# Altium PCB Mega2560PCB.PcbDoc
Units mil, origin at the board's own origin, x right, y up, seen from the top; angles counter-clockwise.
Board outline 3543.31 x 2165.35 mil, 4 copper layers (Top Layer, GND02, PWR03, Bottom Layer), stack 23.756 mil thick; 55 components, 99 nets, 321 pads, 36 vias.
Unrouted connection lines stored in the file: 103.
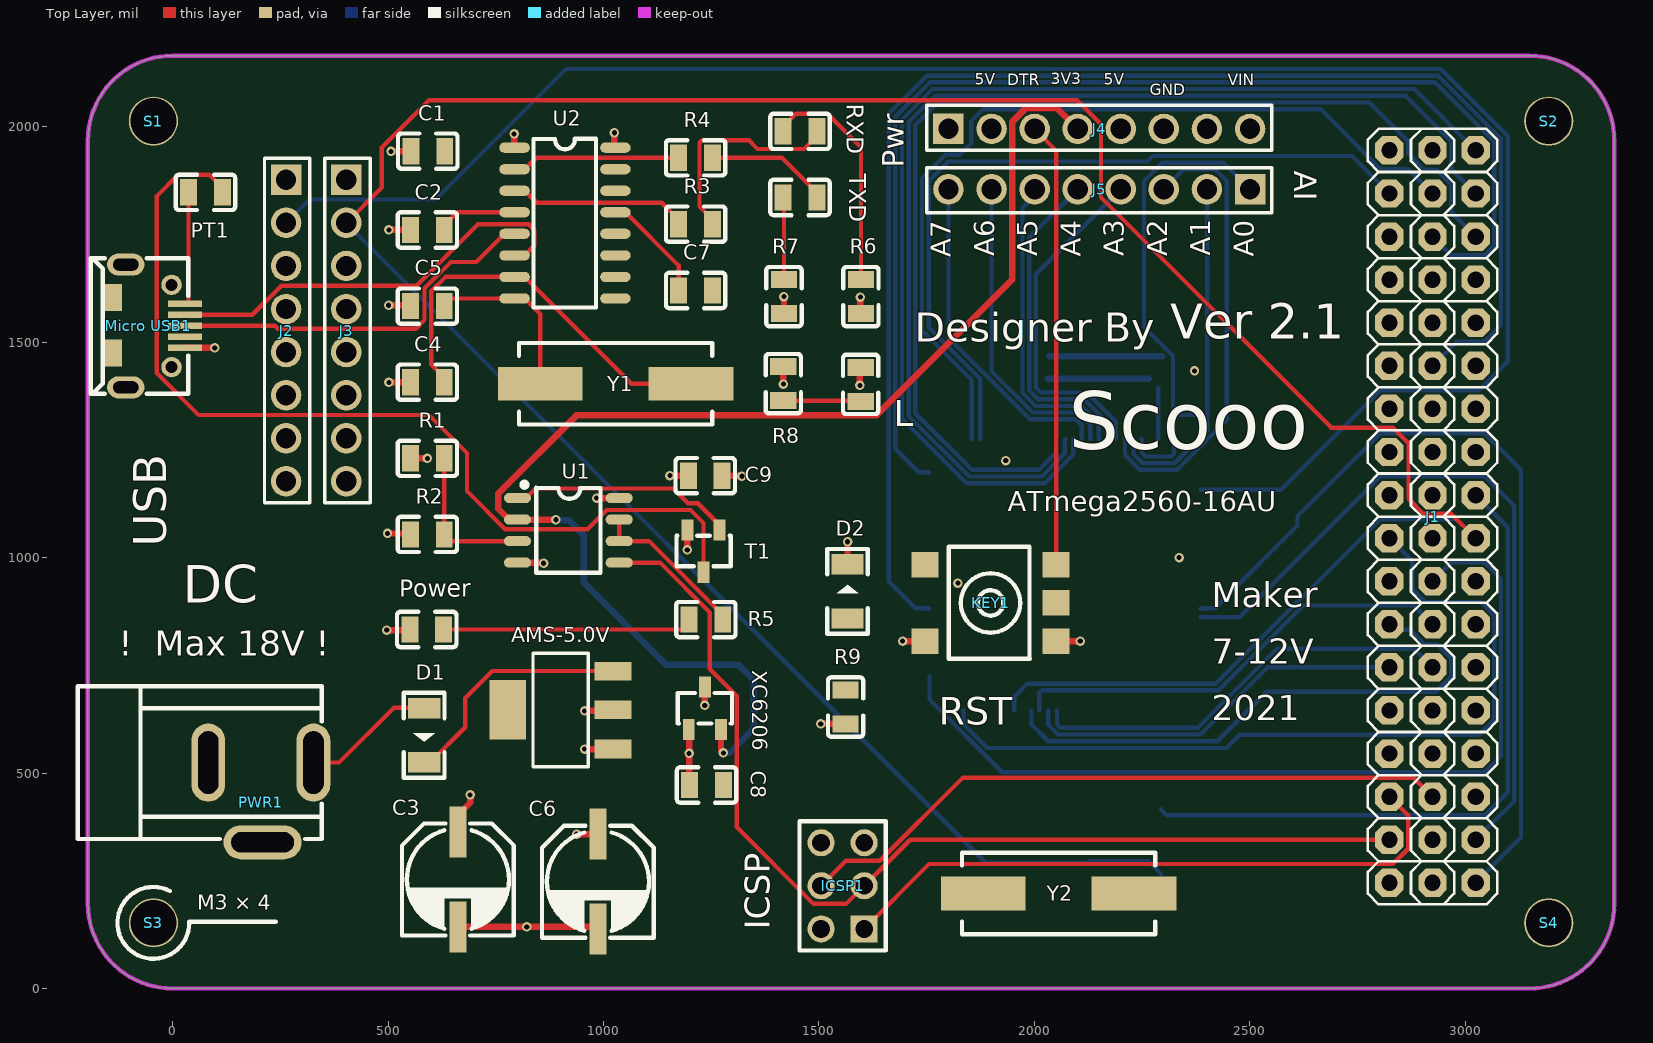
[diagram p0: Top Layer view]
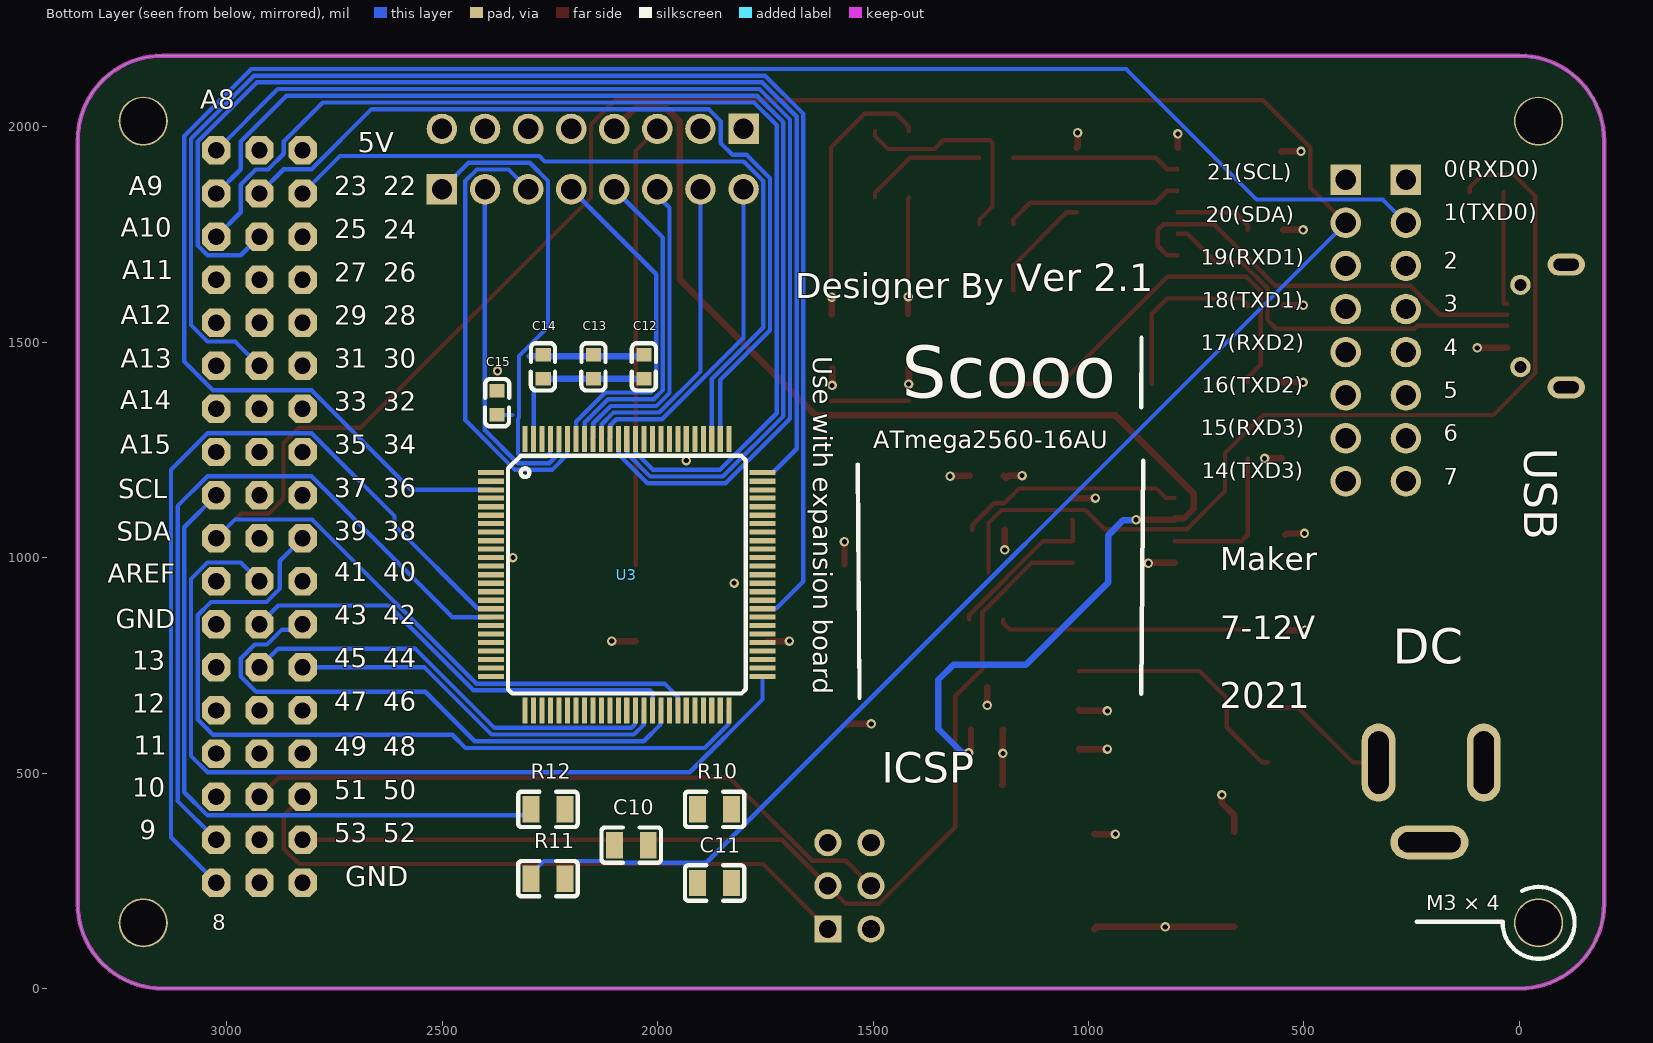
[diagram p1: Bottom Layer view, seen from below]
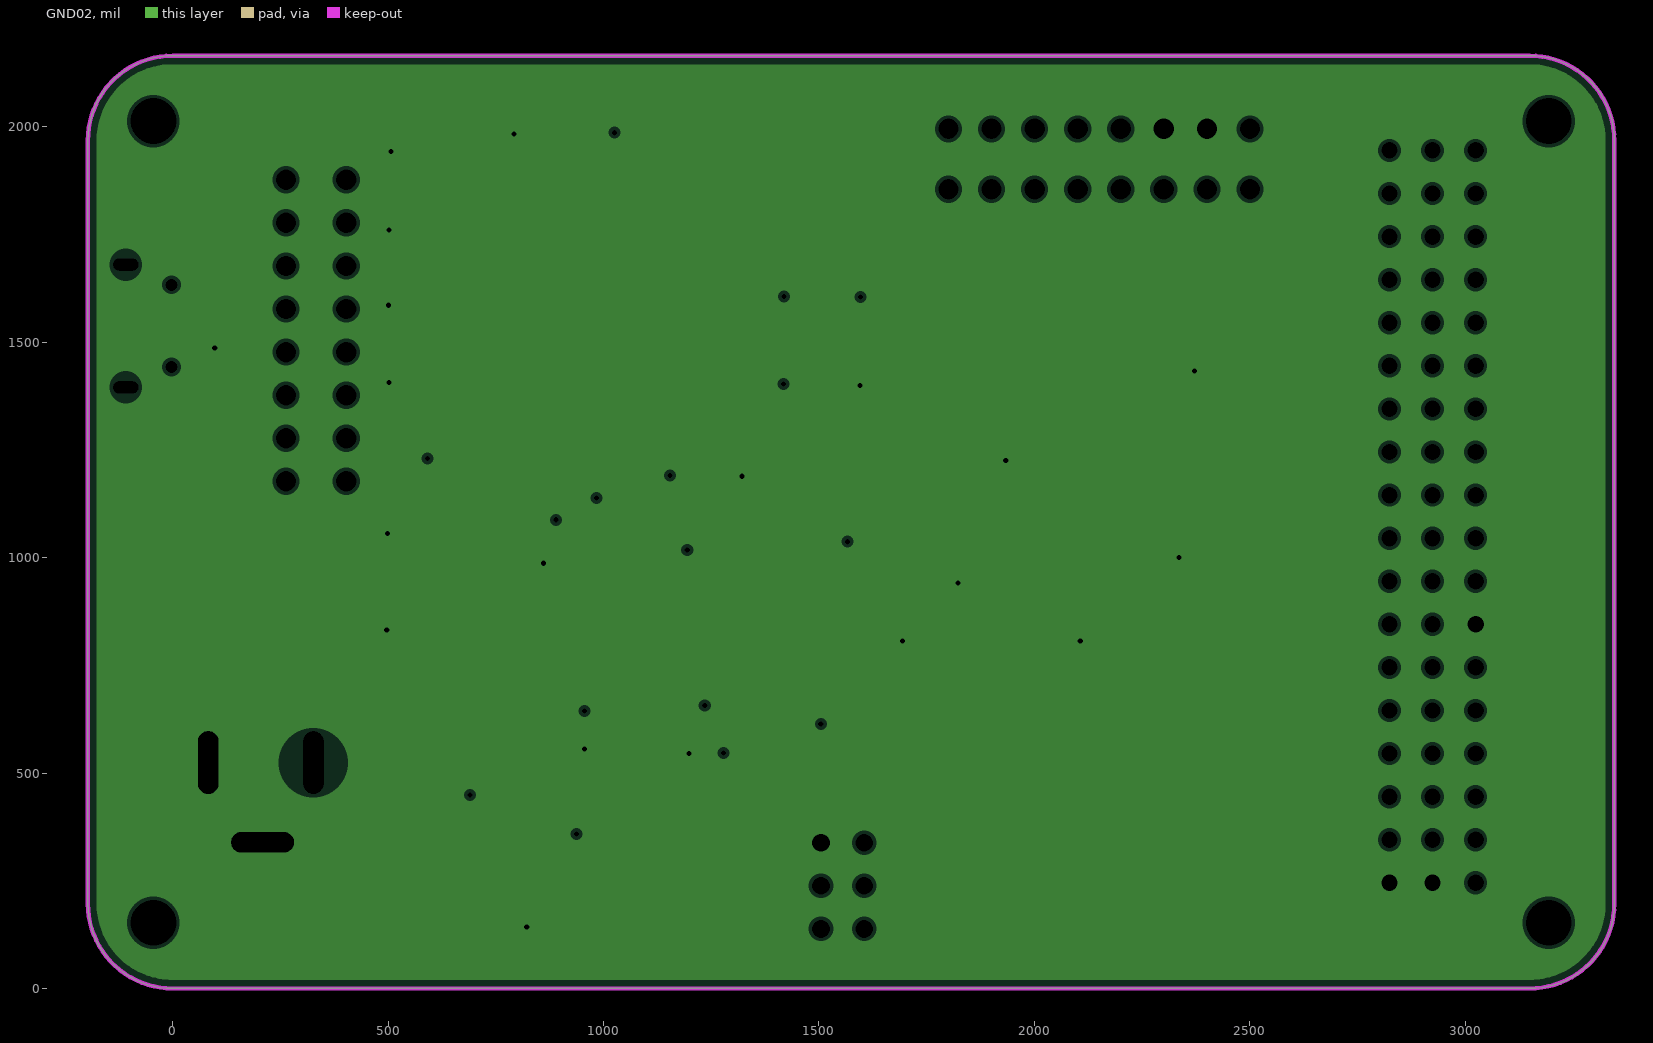
[diagram p2: GND02, clearances drawn from the general rule]
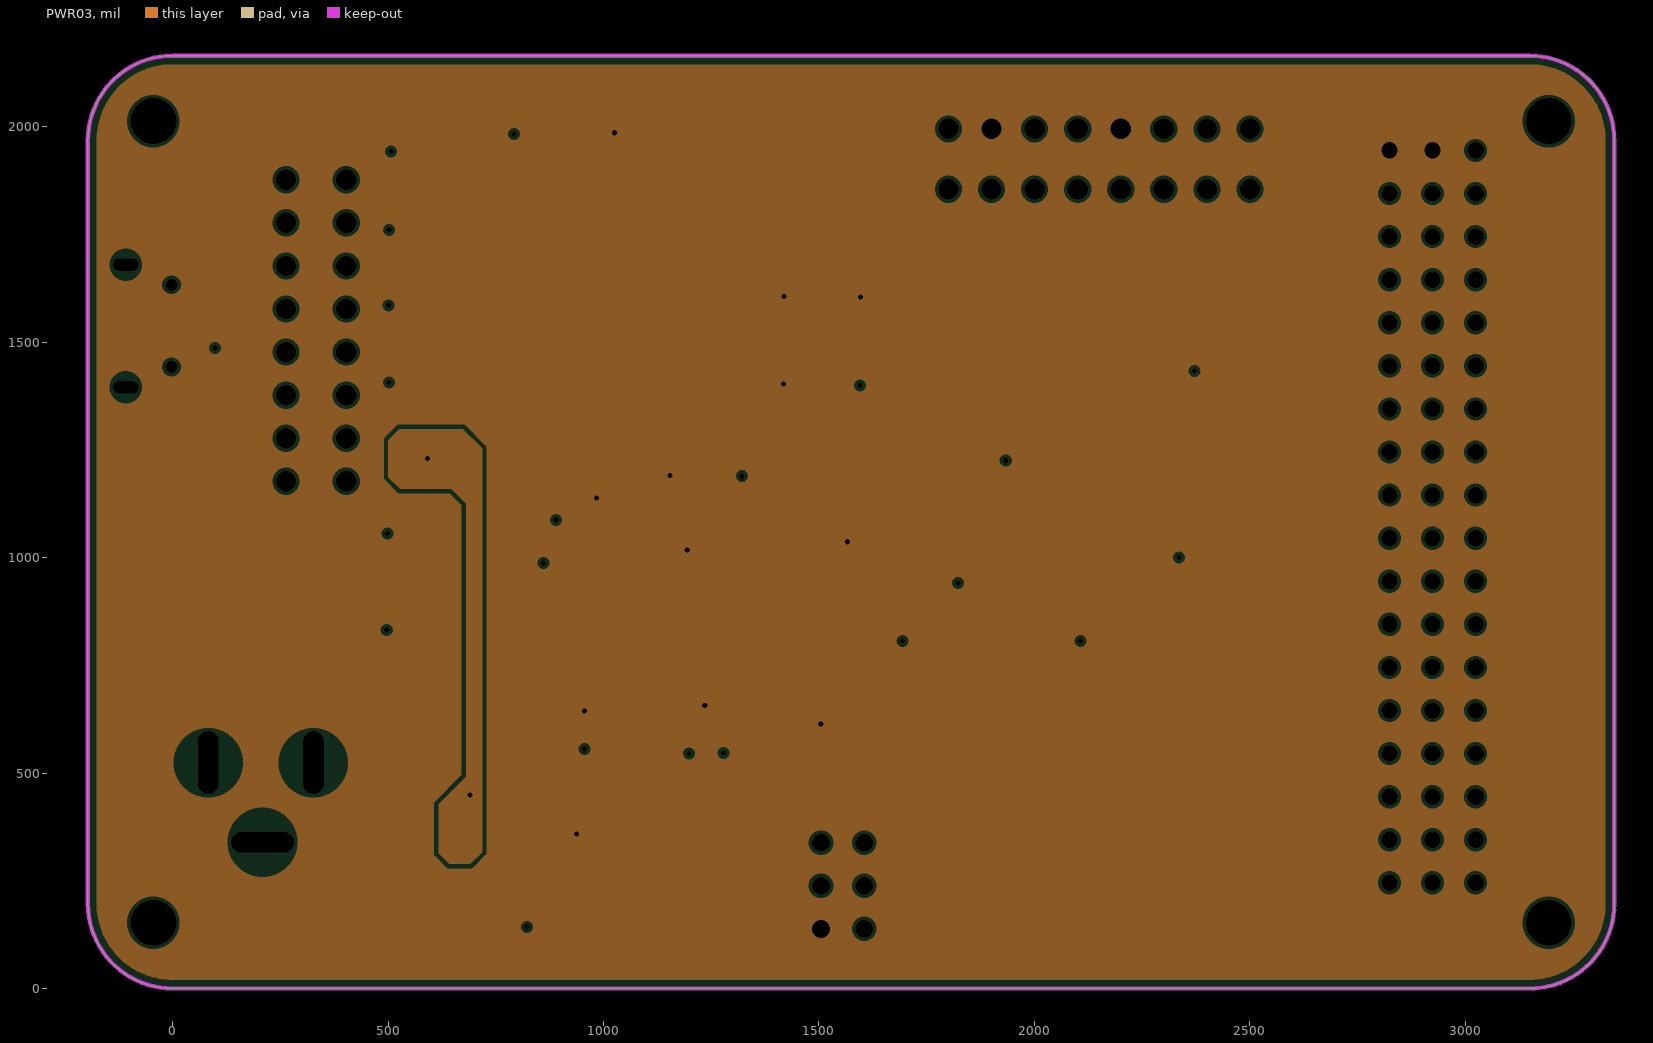
[diagram p3: PWR03, clearances drawn from the general rule]

## Layer stack, top to bottom
Top Solder: solder mask 0.4, Solder Resist, Dk 3.5
Top Layer: signal copper 1.4
Dielectric 2: prepreg 2.8, PP-006, Dk 4.1
GND02: plane copper 1.378, net GND
Dielectric 1: dielectric 12.6, FR-4, Dk 4.8
PWR03: plane copper 1.378, net +5V
Dielectric 3: prepreg 2.8, PP-006, Dk 4.1
Bottom Layer: signal copper 1.4
Bottom Solder: solder mask 0.4, Solder Resist, Dk 3.5

## Board outline
0,0 cw(c0,196.85) -196.85,196.85 -196.85,1968.5 cw(c0,1968.5) 0,2165.35 3149.61,2165.35 cw(c3149.61,1968.5) 3346.46,1968.5 3346.46,196.85 cw(c3149.61,196.85) 3149.61,0

## Design rules (kind name [scope] priority, off if disabled: settings)
Clearance [All] p1: gap=5.5 ignorepadtopadclearanceinfootprint=FALSE
HoleSize [All] p1: absolutevalues=TRUE maxlimit=248.03 minlimit=7.87 maxpercent=80.000 minpercent=20.000
PlaneClearance [All] p1: clearance=8
PlaneConnect [All] p1: planeconnectstyle=Relief reliefexpansion=20 reliefentries=4 reliefconductorwidth=10 reliefairgap=10
PolygonConnect [All] p1: thpad.connectstyle=Relief thpad.reliefconductorwidth=10 thpad.reliefentries=4 thpad.polygonreliefangle="90 Angle" thpad.airgapwidth=10 smdpad.connectstyle=Relief smdpad.reliefconductorwidth=10 smdpad.reliefentries=4 smdpad.polygonreliefangle="90 Angle" smdpad.airgapwidth=10 via.connectstyle=Direct via.reliefconductorwidth=10 via.reliefentries=4 via.polygonreliefangle="90 Angle" via.airgapwidth=10
RoutingVias [All] p1: holewidth=12 width=22 viastyle="Through Hole" minholewidth=12 minwidth=22 maxholewidth=12 maxwidth=22
SilkToSilkClearance [All] p1: silktosilkclearance=2
SilkToSolderMaskClearance [IsPad] p1: minsilkscreentomaskgap=2 clearancetoexposedcopper=TRUE
SolderMaskExpansion [All] p1: expansion=4 istentingtop=FALSE
Width PWR [InNetClass('PWR')] p1: maxlimit=60 minlimit=15 preferedwidth=15
Width [All] p2: maxlimit=15 minlimit=6 preferedwidth=10
25 further rules are at their usual default settings.

## Classes and differential pairs
net class PWR: +3V3 +5V GND VIN

## Components (designator, comment, footprint, x,y, rotation, side; value= is the part's Value field where it differs from the comment)
AMS-5.0V "AMS1117-5.0" AMS1117-5.0V 900.1,646.4 r0 top locked (schematic designator AMS1)
C1 "0.1uF" 0805 592.1,1943.8 r0 top locked
C2 "0.1uF" 0805 591,1760.7 r0 top locked
C3 "100uF 35V" 极性电容 657.15,257.37 r270 top locked
C4 "22pF" 0805 591,1407.33 r0 top locked
C5 "22pF" 0805 591,1584.02 r0 top locked
C6 "100uF 35V" 极性电容 982.15,252.37 r270 top locked
C7 "0.1uF" 0805 1213.8,1620.3 r180 top locked
C8 "0.1pF" 0805 1239.31,472.4 r0 top locked
C9 "0.1uF" 0805 1236.21,1190.4 r0 top locked
C10 "22pF" 0805 2061.37,332.8 r180 bottom locked
C11 "22pF" 0805 1867.87,244.8 r180 bottom locked
C12 "100nF-0603" 0603_CAP 2031.73,1443.06 r90 bottom locked
C13 "100nF-0603" 0603_CAP 2148.86,1443.06 r90 bottom locked
C14 "100nF-0603" 0603_CAP 2265.98,1443.06 r90 bottom locked
C15 "100nF-0603" 0603_CAP 2373.2,1359.8 r270 bottom locked
D1 "二极管" "1206 正负" 583.8,587.9 r90 top locked
D2 "二极管" "1206 正负" 1566.42,921.95 r270 top locked
ICSP1 "ICSP" "排针 2*3 PIN" 1555.1,238.4 r90 top locked
J1 "Header 3*18" "排针 3*18 PIN" 2874.41,1095.38 r0 top locked
J2 "Header 8" "排针 8 PIN" 263.15,1527.27 r270 top locked
J3 "Header 8" "排针 8 PIN" 403.15,1527.27 r270 top locked
J4 "Header 8" "排针 8 PIN" 2150.79,1995.38 r0 top locked
J5 "Header 8" "排针 8 PIN" 2150.79,1855.38 r180 top locked
KEY1 "按键" 按键 1898.5,895.1 r0 top locked
L "LED" "0805 - LED" 1597,1402.3 r90 top locked
"Micro USB1" "Micro USB" MICRO-USB -56.59,1537.88 r270 top locked
Power "LED" "0805 - LED" 589.7,833.4 r180 top locked
PT1 "500MA" 0805 76,1848 r0 top locked
PWR1 "PWR" DC电源 204.6,431.84 r0 top locked
R1 "10K" 0805 591,1230.67 r180 top locked
R2 "10K" 0805 591,1054 r0 top locked
R3 "1K" 0805 1213.8,1774.3 r0 top locked
R4 "1K" 0805 1213.8,1928.32 r0 top locked
R5 "10K" 0805 1237.5,856.4 r180 top locked
R6 "1K" 0805 1597.61,1606.02 r270 top locked
R7 "1K" 0805 1418.98,1606.02 r270 top locked
R8 "1K" 0805 1417.38,1404 r90 top locked
R9 "10K" 0805 1562,653.3 r270 top locked
R10 "1M" 0805 1867.87,415.8 r0 bottom locked
R11 "10K" 0805 2254.87,254.8 r180 bottom locked
R12 "10K" 0805 2254.87,415.8 r180 bottom locked
RXD "LED" "0805 - LED" 1456.3,1989.7 r0 top locked
S1 "散热孔" 散热孔 -44.85,2013.37 r0 top locked
S2 "散热孔" 散热孔 3194.15,2013.37 r0 top locked
S3 "散热孔" 散热孔 -44.85,152.37 r0 top locked
S4 "散热孔" 散热孔 3194.15,152.37 r0 top locked
T1 "MOSFET-P" SI2301 1232.3,1015.4 r90 top locked
TXD "LED" "0805 - LED" 1456.1,1836.2 r0 top locked
U1 "LM358" LM358 918.4,1063.5 r270 top locked
U2 "CH340G" CH340G 910.6,1776.8 r180 top locked
U3 "ATmega2560-16AU" ATMEGA2560-AU 2071.7,960.4 r180 bottom locked
XC6206 "XC6206P332" XC6206P332-3.3V 1235.4,650.4 r270 top locked (schematic designator XC1)
Y1 "12M" 贴片晶振 1028.2,1403.8 r180 top locked
Y2 "16M" 贴片晶振 2056.7,220.5 r0 top locked

## Footprints (in the part's own frame and the unit in brackets; to place one, negate y for a bottom-side part, rotate by r counter-clockwise, add the part's x,y. Pads: shape width x height; smd on the part's side, far side on the other; paste and mask are expansions set on the pad)
0603_CAP [mm]
  rect 0.8x0.9 smd: 1(-0.7,0) 2(0.7,0)
  silkscreen extent -1.4,-0.7 1.4,0.72, body extent -0.8,-0.41 0.8,0.41, height 0.45
0805 [mm]
  rect 1x1.55 smd: 1(-1,0) 2(1,0)
  silkscreen extent -1.75,-1.04 1.75,1.04, body extent -1,-0.62 1,0.62, height 0.5
"0805 - LED" [mm]
  rect 1x1.55 smd: 1(-1,0) 2(1,0)
  silkscreen extent -1.75,-1.04 1.75,1.04, body extent -1,-0.62 1,0.62, height 0.5
"1206 正负" [mm] "开关二极管"
  rect 1.2x1.9 smd: 1(1.6,0) 2(-1.6,0)
  silkscreen extent -2.5,-1.2 2.5,1.2, body extent -1.6,-0.8 1.6,0.8, height 0.55
AMS1117-5.0V [mil]
  rect 85x43 smd: 1(122,-90.5) 2(122,0.5) 3(122,90.5)
  rect 85x138 smd: 4(-122,0.5)
  silkscreen extent -64,-132 64,132, body extent -138,-132 138,132, height 71
ATMEGA2560-AU [mil] "主控芯片"
  rect 60x12 smd: 1(-314.98,236.98) 2(-314.98,216.98) 3(-314.98,196.98) 4(-314.98,177.98) 5(-314.98,157.98) 6(-314.98,137.98) 7(-314.98,118.98) 8(-314.98,98.98) 9(-314.98,78.98) 10(-314.98,59.98) 11(-314.98,39.98) 12(-314.98,19.98) 13(-314.98,-0.02) 14(-314.98,-19.7) 15(-314.98,-39.39) 16(-314.98,-59.07) 17(-314.98,-78.76) 18(-314.98,-98.44) 19(-314.98,-118.13) 20(-314.98,-137.81) 21(-314.98,-157.5) 22(-314.98,-177.18) 23(-314.98,-196.87) 24(-314.98,-216.55) 25(-314.98,-236.24) 51(314.98,-236.24) 52(314.98,-216.55) 53(314.98,-196.87) 54(314.98,-177.18) 55(314.98,-157.5) 56(314.98,-137.81) 57(314.98,-118.13) 58(314.98,-98.44) 59(314.98,-78.76) 60(314.98,-59.07) 61(314.98,-39.39) 62(314.98,-19.7) 63(314.98,-0.02) 64(314.98,19.98) 65(314.98,39.98) 66(314.98,59.98) 67(314.98,78.98) 68(314.98,98.98) 69(314.98,118.98) 70(314.98,137.98) 71(314.98,157.98) 72(314.98,177.98) 73(314.98,196.98) 74(314.98,216.98) 75(314.98,236.98)
  rect 12x60 smd: 26(-236.24,-314.98) 27(-216.56,-314.98) 28(-196.87,-314.98) 29(-177.19,-314.98) 30(-157.5,-314.98) 31(-137.82,-314.98) 32(-118.13,-314.98) 33(-98.45,-314.98) 34(-78.76,-314.98) 35(-59.08,-314.98) 36(-39.39,-314.98) 37(-19.71,-314.98) 38(-0.02,-314.98) 39(19.98,-314.98) 40(39.98,-314.98) 41(59.98,-314.98) 42(78.98,-314.98) 43(98.98,-314.98) 44(118.98,-314.98) 45(137.98,-314.98) 46(157.98,-314.98) 47(177.98,-314.98) 48(196.98,-314.98) 49(216.98,-314.98) 50(236.98,-314.98) 76(236.98,314.98) 77(216.98,314.98) 78(196.98,314.98) 79(177.98,314.98) 80(157.98,314.98) 81(137.98,314.98) 82(118.98,314.98) 83(98.98,314.98) 84(78.98,314.98) 85(59.98,314.98) 86(39.98,314.98) 87(19.98,314.98) 88(-0.02,314.98) 89(-19.71,314.98) 90(-39.39,314.98) 91(-59.08,314.98) 92(-78.76,314.98) 93(-98.45,314.98) 94(-118.13,314.98) 95(-137.82,314.98) 96(-157.5,314.98) 97(-177.19,314.98) 98(-196.87,314.98) 99(-216.56,314.98) 100(-236.24,314.98)
  silkscreen extent -276,-276 276,276, body extent -315,-315 315,315, height 47
CH340G [mil]
  oval 70.79x23.62 smd: 1(117,-175) 2(117,-125) 3(117,-75) 4(117,-25) 5(117,25) 6(117,75) 7(117,125) 8(117,175) 9(-117,175) 10(-117,125) 11(-117,75) 12(-117,25) 13(-117,-25) 14(-117,-75) 15(-117,-125) 16(-117,-175)
  silkscreen extent -72,-196 73,196, body extent -123,-197 123,197, height 59
DC电源 [mm]
  oval 2x4.6 hole 1.2 slot 3.7 at 90 deg: 1(3.1,2.35) 2(-3.1,2.35)
  oval 4.6x2 hole 1.2 slot 3.7 at 0 deg: 3(0.1,-2.35)
  silkscreen extent -10.8,-2.15 3.6,6.85, body extent -10.72,-2.65 3.1,6.85, height 11.2
LM358 [mm]
  oval 0.6x1.598 smd: 1(-1.905,-3) 2(-0.635,-3) 3(0.635,-3) 4(1.905,-3) 5(1.905,3) 6(0.635,3) 7(-0.635,3) 8(-1.905,3)
  silkscreen extent -2.84,-2.74 2.5,1.9, body extent -2.5,-3 2.5,3, height 1.8
MICRO-USB [mm]
  oval 1.3x2.199 hole 0.7 slot 1.5 at 90 deg: 0(-3.619,-1.329) 0(3.619,-1.329)
  round 1.2 hole 0.7: 0(-2.425,1.371) 0(2.425,1.371)
  rect 1.6x1.2 smd: 0(-1.683,-2.14) 0(1.596,-2.156)
  rect 0.4x2 smd: 1(-1.31,2.156) 2(-0.66,2.156) 3(-0.01,2.156) 4(0.64,2.156) 5(1.29,2.156)
  silkscreen extent -4,-3.4 4,2.36, body extent -3.98,-4.32 3.98,1.46, height 2.37
SI2301 [mm]
  rect 1.25x0.7 smd: 1(1.25,-0.95) 2(1.25,0.95) 3(-1.25,0)
  silkscreen extent -0.9,-1.6 0.9,1.6
XC6206P332-3.3V [mm]
  rect 1.25x0.7 smd: 1(1.25,-0.95) 2(1.25,0.95) 3(-1.25,0)
  silkscreen extent -0.9,-1.6 0.9,1.6
按键 [mm] "6*6"
  rect 1.6x1.5 smd: 1(-3.867,2.25) 2(3.867,2.25) 3(-3.867,-2.25) 4(3.867,-2.25) 5(3.867,0)
  silkscreen extent -2.46,-3.3 2.32,3.3
"排针 2*3 PIN" [mm]
  rect 1.6x1.6 hole 1.05: 1(-2.54,-1.27)
  round 1.6 hole 1.05: 2(-2.54,1.27) 3(0,-1.27) 4(0,1.27) 5(2.54,-1.27) 6(2.54,1.27)
  silkscreen extent -3.81,-2.54 3.81,2.54, body extent -3.81,-2.54 3.81,2.54, height 8.54
"排针 3*18 PIN" [mil]
  oct 66x66 hole 38: 1(-50,850) 2(50,850) 3(-50,750) 4(50,750) 5(-50,650) 6(50,650) 7(-50,550) 8(50,550) 9(-50,450) 10(50,450) 11(-50,350) 12(50,350) 13(-50,250) 14(50,250) 15(-50,150) 16(50,150) 17(-50,50) 18(50,50) 19(-50,-50) 20(50,-50) 21(-50,-150) 22(50,-150) 23(-50,-250) 24(50,-250) 25(-50,-350) 26(50,-350) 27(-50,-450) 28(50,-450) 29(-50,-550) 30(50,-550) 31(-50,-650) 32(50,-650) 33(-50,-750) 34(50,-750) 35(-50,-850) 36(50,-850) 37(150,850) 38(150,750) 39(150,650) 40(150,550) 41(150,450) 42(150,350) 43(150,250) 44(150,150) 45(150,50) 46(150,-50) 47(150,-150) 48(150,-250) 49(150,-350) 50(150,-450) 51(150,-550) 52(150,-650) 53(150,-750) 54(150,-850)
  silkscreen extent -100,-900 200,900, body extent -100,-900 200,900, height 336
"排针 8 PIN" [mm]
  rect 1.8x1.8 hole 1.2: 1(-8.89,0)
  round 1.8 hole 1.2: 2(-6.35,0) 3(-3.81,0) 4(-1.27,0) 5(1.27,0) 6(3.81,0) 7(6.35,0) 8(8.89,0)
  silkscreen extent -10.16,-1.27 10.16,1.4, body extent -10.16,-1.27 10.16,1.27, height 8.54
散热孔 [mm]
  round 2.9 hole 2.7: 1(0,0)
极性电容 [mm]
  rect 3x1 smd: 1(-2.691,0.124) 2(2.909,0.124)
  silkscreen extent -3.19,-3.18 3.41,3.42
贴片晶振 [mm] "OSC-SMD_L11.5-W4.8-P9.50"
  rect 5x2 smd: 1(-4.445,0) 2(4.445,0)
  silkscreen extent -5.7,-2.4 5.7,2.4

## Part data
C1 C2 C4 C5 C7 C9 C10 C11: library part CAP
C3 C6: library part "Cap Pol极性电容", "极性电容器", LatestRevisionDate=17-Jul-2002, LatestRevisionNote="Re-released for DXP Platform.", PackageDescription="Polarized Capacitor (Radial); 2 Leads", PackageReference=RB7.6-15, Published=8-Jun-2000, Publisher="Altium Limited"
C8: library part CAP电容
C12 C13 C14 C15: library part CAP-0603, "0603 50V"
ICSP1: library part "Header 2*3", "排针"
J2 J3 J4 J5: "排针"
KEY1: "Switch", LatestRevisionDate=17-Jul-2002, LatestRevisionNote="Re-released for DXP Platform.", PackageDescription="Switch; 2 Leads", PackageReference=SPST-2, Published=24-Mar-1999, Publisher="Altium Limited"
PT1: library part PT, "磁珠"
R1 R2 R3 R4 R5 R6 R7 R8 R9 R10: library part RES
R11 R12: library part 电阻
T1: library part MOSFET-P(MOS), "摩斯管", LatestRevisionDate=17-Jul-2002, LatestRevisionNote="Re-released for DXP Platform.", PackageDescription="TO, Flat Index; 3 In-Line, Axial Leads; Body Dia. 4.6mm; Lead Dia. 0.5 mm (max)", PackageReference=E3, PackageVersion=1995/1996, Published=8-Jun-2000, Publisher="Altium Limited"
U1: "电源控制"
U3: "8-bit AVR Microcontroller, 4.5-5.5V, 16MHz, 256KB Flash, 4KB EEPROM, 8KB SRAM, 86 GPIO pins, 100-pin TQFP, Industrial Grade (-40°C to 85°C), Pb-Free", Code_JEDEC=MS-026-AED, ComponentLink1Description="Manufacturer URL", ComponentLink1URL=http://www.atmel.com/, ComponentLink2Description="ATmega640/1280/1281/2560/2561 Datasheet", ComponentLink2URL=http://www.atmel.com/dyn/resources/prod_documents/doc2549.pdf, ComponentLink3Description="ATmega640/1280/1281/2560/2561 Summary", ComponentLink3URL=http://www.atmel.com/dyn/resources/prod_documents/2549S.pdf, DatasheetVersion="revN, May-2011", PackageDescription="100-Pin Thin Profile Plastic Quad Flat Pack (TQFP), 14 x 14 x 1.0 mm Body, 0.5 mm Pitch", PackageReference=100A, PackageVersion="revD, Oct-2010"
Y1 Y2: library part CRYSTAL

## Via types
v1: diameter 22, hole 12, Top Layer to Bottom Layer, tented both sides, 36 vias

## Nets (pads, with @x,y where several pads share a name; then routed paths per layer and width w, separated by ;. In a path a pad name is that pad's centre, name@x,y a point inside that pad or via, vN(x,y) a via of type N, cw(c..) or ccw(c..) an arc to the next point about the centre after c; other vN are vias at no path point)
+3V3: C8.2 J4.4 U1.2 XC6206.2 | length 3070.6
  Top Layer w15: v1(889.7,1088) 889.45,1088.25 800.54,1088.25 U1.2 797.47,1091.32 777.83,1091.32 755.83,1113.31 755.83,1148.78 937.3,1330.24 1632.9,1330.24 1949.22,1646.57 1949.22,2012.31 1980.73,2043.82 2052.35,2043.82 J4.4 ; XC6206.2 1272.8,554.39 1278.4,548.79 v1(1278.4,546.9)
  Bottom Layer w15: v1(889.7,1088) 891.04,1086.66 919.74,1086.66 953.8,1052.6 953.8,943.2 1145.2,751.8 1313.4,751.8 1348.8,716.4 1348.8,602.9 1292.8,546.9 v1(1278.4,546.9)
+5V: AMS-5.0V.2 C1.2 C6.1 C9.1 C12.2 C13.2 C14.2 D2.2 ICSP1.2 J1.1 J1.2 J4.2 J4.5 R6.2 R7.2 R8.2 R9.2 R11.2 R12.2 T1.2 U1.8 U2.16 U3.100 XC6206.3 | length 835.4
  Top Layer w15: v1(937.4,358.5) 937.58,358.32 C6.1 ; v1(956.3,644.2) 1019.4,644.2 AMS-5.0V.2 ; v1@983.5,1138 v1(984,1138.5) U1.8 ; v1(1025.3,1986.5) 1025.3,1954.1 U2.16 ; v1(1154.2,1190.5) 1184.54,1190.5 1190.74,1184.3 C9.1 ; v1(1194.4,1017.9) 1194.9,1018.4 T1.2 ; v1(1235.1,657.2) 1235.4,657.5 XC6206.3 ; v1@1417.7,1403.1 R8.2@1417.7,1442.63 ; R7.2 v1(1418.98,1606.18) ; v1(1504.4,614.1) 1557.77,614.1 1559.97,611.9 R9.2 ; D2.2 1566.42,1036.92 v1(1566.7,1037.2) ; R6.2@1596.3,1565.37 v1@1596.3,1604.9
  Bottom Layer w15: C12.2@2034.25,1468.1 2296.7,1468.1
  other v1: 1417.48,1402.88 1596.52,1605.12
AREF: C15.2 J1.47 U3.98 | length 35.7
  Bottom Layer w10: 2337.46,1331.04 C15.2@2373.2,1331.04
DTR: C7.1 D2.1 ICSP1.5 J4.3 KEY1.1 KEY1.2 R9.1 U3.30 | length 1032.4
  Top Layer w10: J4.3 2050.74,1945.43 KEY1.2
GND: "Micro USB1.5" AMS-5.0V.1 C1.1 C2.1 C3.2 C4.1 C5.1 C6.2 C8.1 C9.2 C10.2 C11.2 C12.1 C13.1 C14.1 C15.1 ICSP1.6 J1.35 J1.36 J1.48 J4.6 J4.7 KEY1.3 KEY1.4 L.2 Power.2 PWR1.2 PWR1.3 R2.1 U1.4 U2.1 U3.11 U3.32 U3.62 U3.81 U3.99 XC6206.1 | length 1512.2
  Top Layer w15: 28.29,1487.11 v1@97.69,1487.11 ; v1(496.9,832.1) 541.53,832.1 Power.2@542.13,832.7 ; v1(498.6,1056.2) 539.93,1056.2 R2.1@543.13,1053 ; v1(501.3,1585.9) 546.73,1585.9 C5.1@546.83,1586 ; v1(501.9,1406.9) 546.53,1406.9 C4.1@547.23,1406.2 ; v1(501.9,1761) 547.53,1761 C2.1@548.03,1760.5 ; v1(506.75,1943.1) v1@515,1943.1 ; v1@515.7,1943.8 v1@515,1943.1 ; C4.1 C4.1@552.18,1407.88 ; C1.1 551.63,1942.7 551.23,1943.1 v1@515,1943.1 ; C3.2 v1(822.05,142.84) 982.05,142.84 C6.2 ; U2.1@792.4,1951.8 v1(792.4,1983.6) ; U1.4 859.7,988.5 v1(861,987.2) ; v1(956.2,555.8) 1022,555.8 AMS-5.0V.1 ; XC6206.1 1198.97,600.23 1198.97,473.37 C8.1 ; C9.2 1320.1,1190.4 v1(1321.25,1189.25) ; v1@1595.3,1400 L.2@1595.3,1439.53 ; v1@1693.2,805.6 v1(1694.12,806.52) KEY1.3 ; KEY1.4 2105.66,806.52 2106.88,805.3 v1@2108.1,805.3
  Bottom Layer w10: U3.99@2287.44,1275.38 2287.44,1394.04
  Bottom Layer w15: C12.1 C14.1
  other v1: 1198.6,545.7 2106.88,806.52 1822.7,941.1 2336.28,1000.38 1933.72,1225.52 1595.08,1399.78 2371.9,1433.4 97.7,1487.1
MRX: R4.2 TXD.2 | length 286.8
  Top Layer w10: R4.2 1414.18,1928.32 1495.47,1847.03 TXD.2
MTX: R3.2 RXD.2 | length 508.5
  Top Layer w10: R3.2 1253.17,1785.13 1222.98,1815.31 1222.98,1963.18 1229.14,1969.33 1336.99,1969.33 1357.63,1948.69 1465.48,1948.69 1495.67,1978.87 RXD.2
NetAMS-5.0V_3: AMS-5.0V.3 D1.2 | length 565.8
  Top Layer w10: D1.2 597.58,524.91 678.98,606.31 678.98,674.13 741.75,736.9 AMS-5.0V.3
NetC2_2: C2.2 U2.4 | length 186.6
  Top Layer w10: C2.2 630.37,1771.52 660.65,1801.8 U2.4
NetC4_2: C4.2 U2.7 Y1.1 | length 943.4
  Top Layer w10: C4.2 630.37,1418.16 600.18,1448.34 600.18,1618.88 633.1,1651.8 U2.7 817.18,1651.8 1065.18,1403.8 Y1.1
NetC5_2: C5.2 U2.8 Y1.2 | length 408.9
  Top Layer w10: C5.2 630.37,1587.11 645.05,1601.8 U2.8 817.18,1601.8 853.2,1565.78 Y1.2
NetC7_2: C7.2 U2.13 | length 256.1
  Top Layer w10: U2.13 1051.18,1801.8 1174.43,1678.55 C7.2
NetC10_1: C10.1 R10.1 U3.34 Y2.1
NetC11_1: C11.1 R10.2 U3.33 Y2.2
NetD1_1: D1.1 PWR1.1 | length 310.3
  Top Layer w10: PWR1.1 386.07,524.37 513.5,651.8 582.89,651.8 D1.1
NetJ2_1: J2.1 U3.2
NetJ2_2: J2.2 U3.3 | length 4407.2
  Bottom Layer w10: J2.2 317.22,1831.34 609.73,1831.34 912.71,2134.32 2943.67,2134.32 3098.91,1979.07 3098.91,1455.53 3032.26,1388.88 2803.56,1388.88 2572.06,1157.38 U3.3
NetJ2_3: J2.3 U3.6
NetJ2_6: J2.6 U3.5
NetJ5_1: J5.1 U3.97 | length 1064.3
  Bottom Layer w10: U3.97 2249.89,1274.38 2249.89,1243.21 2258.22,1234.88 2318.29,1234.88 2324.44,1241.03 2324.44,1322.14 2321.96,1324.62 2321.96,1468.3 2254.85,1535.4 2254.85,1874.41 2297.26,1916.82 2439.35,1916.82 J5.1
NetJ5_2: J5.2 U3.96 | length 806.3
  Bottom Layer w10: U3.96 2230.2,1274.38 2230.2,1240.98 2251.8,1219.38 2324.71,1219.38 2401.42,1296.09 2401.42,1854.75 J5.2
NetJ5_3: J5.3 U3.95 | length 1066.6
  Bottom Layer w10: U3.95 2210.52,1274.38 2210.52,1238.74 2245.38,1203.88 2331.13,1203.88 2446.72,1319.47 2446.72,1874.41 2419.81,1901.32 2346.72,1901.32 J5.3
NetJ5_4: J5.4 U3.94 | length 801.2
  Bottom Layer w10: U3.94 2189.83,1315.49 2121.98,1383.34 2015.59,1383.34 2003.52,1395.41 2003.52,1658.11 J5.4
NetJ5_5: J5.5 U3.93 | length 764.5
  Bottom Layer w10: J5.5 1988.02,1742.61 1988.02,1388.99 2009.16,1367.84 2115.56,1367.84 2169.15,1314.25 2169.15,1276.38 U3.93
NetJ5_6: J5.6 U3.92 | length 727.7
  Bottom Layer w10: J5.6 2000.79,1840.6 1972.52,1812.33 1972.52,1382.57 2002.74,1352.34 2109.14,1352.34 2149.46,1312.02 2149.46,1276.38 U3.92
NetJ5_7: J5.7 U3.91 | length 737.6
  Bottom Layer w10: J5.7 1900.79,1432.37 1996.32,1336.84 2102.72,1336.84 2129.78,1309.78 2129.78,1276.38 U3.91
NetJ5_8: J5.8 U3.90 | length 770.9
  Bottom Layer w10: J5.8 1800.79,1510.45 1989.9,1321.34 2096.3,1321.34 2110.09,1307.55 2110.09,1276.38 U3.90
NetL_1: L.1 R8.1 | length 180.3
  Top Layer w10: R8.1 1595.3,1364.63 L.1
"NetMicro USB1_1": "Micro USB1.1" PT1.1 | length 265.2
  Top Layer w10: 28.29,1589.47 33.76,1589.47 36.63,1592.35 PT1.1
"NetMicro USB1_2": "Micro USB1.2" U2.6 | length 995.8
  Top Layer w10: 28.29,1563.88 184.8,1563.88 252.26,1631.34 566.06,1631.34 708.83,1774.11 826.42,1774.11 839.49,1761.04 839.49,1724.11 817.18,1701.8 U2.6
"NetMicro USB1_3": "Micro USB1.3" U2.5 | length 902.4
  Top Layer w10: 28.29,1538.29 237.17,1538.29 244.12,1531.34 563.99,1531.34 584.68,1552.03 584.68,1625.3 645.71,1686.33 704.54,1686.33 770.02,1751.8 U2.5
NetPower_1: Power.1 R5.2 | length 583.5
  Top Layer w10: Power.1 1183.44,833.4 1198.13,848.08 R5.2
NetR1_1: R1.1 R2.2 U1.3 | length 353.5
  Top Layer w10: R1.1 R2.2 630.37,1053.18 645.05,1038.5 U1.3
NetR3_1: R3.1 U2.3 | length 419.3
  Top Layer w10: U2.3 817.18,1851.8 844.87,1824.11 1135.45,1824.11 1174.43,1785.13 R3.1
NetR4_1: R4.1 U2.2 | length 391.8
  Top Layer w10: U2.2 817.18,1901.8 843.7,1928.32 R4.1
NetR5_1: R5.1 U1.6 U1.7 | length 372.1
  Top Layer w10: U1.7 U1.6 1105.6,1038.5 1276.87,867.23 R5.1
NetR6_1: R6.1 RXD.1 | length 543.7
  Top Layer w10: RXD.1 1416.93,2000.53 1447.11,2030.71 1519.7,2030.71 1597.61,1952.81 R6.1
NetR7_1: R7.1 TXD.1 | length 191.7
  Top Layer w10: TXD.1 1418.98,1833.95 R7.1
NetT1_1: T1.1 U1.1 | length 524.8
  Top Layer w10: U1.1 819.93,1138.5 842.25,1160.81 1161.38,1160.81 1195.88,1126.31 1218.81,1126.31 1269.7,1075.43 T1.1
PA0: J1.3 U3.78 | length 1778.2
  Bottom Layer w10: U3.78 1874.72,1414.6 1754.85,1534.47 1754.85,1874.41 1800.09,1919.64 2262.45,1919.64 2275.12,1932.32 2737.48,1932.32 J1.3
PA1: J1.4 U3.77 | length 2015.6
  Bottom Layer w10: U3.77 1854.72,1412.68 1739.35,1528.05 1739.35,1880.83 1793.67,1935.14 1826.26,1935.14 1854.01,1962.89 1854.01,2013.57 1881.76,2041.32 2664.13,2041.32 2803.56,1901.88 2867.91,1901.88 J1.4
PA2: J1.5 U3.76
PA3: J1.6 U3.75 | length 2766
  Bottom Layer w10: U3.75 1755.72,1198.38 1731.72,1198.38 1677.35,1252.74 1677.35,2023.43 1757.24,2103.32 2930.83,2103.32 3067.91,1966.23 3067.91,1724.53 3045.26,1701.88 2967.91,1701.88 J1.6
PA4: J1.7 U3.74
PA5: J1.8 U3.73
PA6: J1.9 U3.72
PA7: J1.10 U3.71
PB0: J1.34 U3.19
PB1: ICSP1.3 J1.33 U1.5 U3.20 | length 2432.8
  Top Layer w10: U1.5 1131.08,988.5 1246.68,872.89 1246.68,741.55 1309.39,678.84 1309.39,374.72 1487.7,196.4 1563.1,196.4 ICSP1.3 1712.08,345.38 J1.33
PB2: ICSP1.4 J1.32 U3.21 | length 1541.1
  Top Layer w10: ICSP1.4 1563.1,296.4 1641.18,296.4 1833.66,488.88 2880.91,488.88 J1.32
PB3: ICSP1.1 J1.31 U3.22 | length 1478.8
  Top Layer w10: ICSP1.1 1755.58,288.88 2832.26,288.88 2867.91,324.53 2867.91,401.88 J1.31
PB4: J1.52 U3.23
PB5: J1.51 U3.24
PB6: J1.50 U3.25
PB7: J1.49 U3.26
PC0: J1.18 U3.53
PC1: J1.17 U3.54
PC2: J1.16 U3.55
PC3: J1.15 U3.56
PC4: J1.14 U3.57
PC5: J1.13 U3.58
PC6: J1.12 U3.59 | length 3355.5
  Bottom Layer w10: U3.59 1755.72,882.64 1724.56,882.64 1661.85,945.34 1661.85,2029.85 1750.82,2118.82 2937.25,2118.82 3083.41,1972.65 3083.41,1540.03 3045.26,1501.88 2980.91,1501.88 J1.12
PC7: J1.11 U3.60
PD7: J1.19 U3.50 | length 1911.8
  Bottom Layer w10: U3.50 1835.72,644.42 1835.72,613.57 1890.87,558.42 2446.33,558.42 2476.8,588.88 3032.26,588.88 3067.91,624.53 3067.91,866.23 3036.84,897.3 2908.14,897.3 2877.08,928.37 2877.08,992.72 J1.19
PE5: J2.4 U3.7
PG0: J1.22 U3.51 | length 2069.4
  Bottom Layer w10: U3.51 1756.72,670.65 1925.49,501.88 3045.26,501.88 3083.41,540.03 3083.41,950.73 3045.26,988.88 2967.91,988.88 J1.22
PG1: J1.21 U3.52
PG2: J1.20 U3.70
PG5: J2.5 U3.1
PH3: J2.7 U3.15
PH4: J2.8 U3.16
PH5: J1.54 U3.17 | length 1962.1
  Bottom Layer w10: U3.17 2387.68,882.64 2418.84,882.64 2611.2,1075 2611.2,1096.52 2803.56,1288.88 3045.26,1288.88 3129.91,1204.23 3129.91,350.88 J1.54
PH6: J1.53 U3.18 | length 1703.4
  Bottom Layer w10: U3.18 2476.63,861.96 2803.56,1188.88 3045.26,1188.88 3114.41,1119.73 3114.41,435.38 J1.53
PK0: J1.37 U3.89 | length 2637.7
  Bottom Layer w10: U3.89 2090.41,1274.38 2090.41,1239.38 2024.05,1173.02 1842.39,1173.02 1692.85,1322.56 1692.85,2017 1763.66,2087.82 2881.98,2087.82 J1.37
PK1: J1.38 U3.88 | length 2631.6
  Bottom Layer w10: U3.88 2070.72,1274.38 2070.72,1241.61 2017.63,1188.52 1848.81,1188.52 1708.35,1328.98 1708.35,2010.58 1770.09,2072.32 2861.83,2072.32 2967.91,1966.23 2967.91,1901.88 J1.38
PK2: J1.39 U3.87 | length 2604.5
  Bottom Layer w10: U3.87 2050.72,1274.38 2050.72,1243.53 2011.21,1204.02 1855.23,1204.02 1723.85,1335.4 1723.85,2004.16 1776.51,2056.82 2777.33,2056.82 2867.91,1966.23 2867.91,1937.53 2904.28,1901.16 2932.98,1901.16 2968.09,1866.05 2968.09,1801.7 J1.39
PK3: J1.40 U3.86
PK4: J1.41 U3.85
PK5: J1.42 U3.84
PK6: J1.43 U3.83
PK7: J1.44 U3.82
PL0: J1.30 U3.35
PL1: J1.29 U3.36
PL2: J1.28 U3.37
PL3: J1.27 U3.38
PL4: J1.26 U3.39 | length 1001.8
  Bottom Layer w10: U3.39 2052.72,644.42 2052.72,613.57 2061.37,604.92 2379.16,604.92 2563.12,788.88 2880.91,788.88 J1.26
PL5: J1.25 U3.40 | length 899.7
  Bottom Layer w10: U3.40 2032.72,644.42 2032.72,611.65 2054.95,589.42 2385.58,589.42 2541.54,745.38 J1.25
PL6: J1.24 U3.41 | length 1055.1
  Bottom Layer w10: U3.41 2011.72,685.68 2018.2,692.16 2427.45,692.16 2624.17,888.88 2880.91,888.88 J1.24
PL7: J1.23 U3.42 | length 1303.8
  Bottom Layer w10: U3.42 1993.72,644.42 1993.72,612.57 2032.37,573.92 2424.83,573.92 2539.8,688.88 2932.26,688.88 2967.91,724.53 2967.91,766.23 2935.55,798.59 2906.85,798.59 2872.41,833.03 2836.76,833.03 J1.23
RXD1: J3.3 U3.45
RXD2: J3.5 U3.12
RXD3: J3.7 U3.63
SCL: J1.45 J3.1 R12.1 U3.43 | length 1553.4
  Bottom Layer w10: R12.1 2308.16,401.88 3045.26,401.88 3098.91,455.53 3098.91,1070.88 J1.45
SDA: J1.46 J3.2 R11.1 U3.44 | length 7212.9
  Top Layer w10: J3.2 485.25,1859.37 485.25,1952.01 595.06,2061.82 2099.31,2061.82 2154.85,2006.27 2154.85,1836.36 2689.33,1301.88 2832.26,1301.88 2868.63,1265.51 2868.63,1136.81 2903.74,1101.7 2968.09,1101.7 J1.46
  Bottom Layer w10: J3.2 403.15,1776.1 1887.47,291.79 2124.77,291.79 2128.8,295.81 2264.05,295.81 2294.24,265.63 R11.1 ; U3.44 1953.72,646.42 1953.72,677.27 1984.11,707.66 2421.03,707.66 2802.25,1088.88 2980.91,1088.88 J1.46
TXD1: J3.4 U3.46
TXD2: J3.6 U3.13
TXD3: J3.8 U3.64
VBUS: PT1.2 T1.3 | length 2223.4
  Top Layer w10: PT1.2 115.37,1858.83 85.18,1889.01 12.6,1889.01 -36.72,1839.7 -36.72,1428.28 60.22,1331.34 594.75,1331.34 683.08,1243.01 683.08,1154.52 771.4,1066.19 963,1066.19 1007.62,1110.81 1201.92,1110.81 1232.3,1080.44 T1.3
VIN: C3.1 J4.8 R1.2 | length 138.2
  Top Layer w15: R1.2 590.83,1230.67 v1@591.6,1229.9 ; C3.1 662.05,402.69 690.5,431.14 v1(690.5,449.4)
  other v1: 591.21,1230.29
pads on no net: "Micro USB1.0" "Micro USB1.4" AMS-5.0V.4 J4.1 KEY1.5 S1.1 S2.1 S3.1 S4.1 U2.9 U2.10 U2.11 U2.12 U2.14 U2.15 U3.4 U3.8 U3.9 U3.10 U3.14 U3.27 U3.28 U3.29 U3.31 U3.47 U3.48 U3.49 U3.61 U3.65 U3.66 U3.67 U3.68 U3.69 U3.79 U3.80

## Polygon pours and split planes (outlines as drawn)
GND on GND02 (split plane): 3161.17,2144.97 3172.69,2143.84 3184.11,2141.95 3195.38,2139.32 3206.45,2135.96 3217.28,2131.89 3227.82,2127.11 3238.03,2121.66 3247.86,2115.55 3257.26,2108.8 3266.21,2101.46 3274.65,2093.55 3282.57,2085.11 3289.91,2076.16 3296.65,2066.75 3302.76,2056.93 3308.21,2046.72 3312.99,2036.18 3317.07,2025.35 3320.43,2014.28 3323.05,2003 3324.94,1991.59 3326.07,1980.07 3326.43,1969.2 3326.36,1968.5 3326.36,196.85 3326.43,196.15 3326.07,185.28 3324.94,173.77 3323.05,162.35 3320.43,151.08 3317.07,140.01 3312.99,129.18 3308.21,118.63 3302.76,108.43 3296.65,98.6 3289.91,89.19 3282.57,80.25 3274.65,71.8 3266.21,63.89 3257.26,56.55 3247.86,49.81 3238.03,43.7 3227.82,38.24 3217.28,33.47 3206.45,29.39 3195.38,26.03 3184.11,23.4 3172.69,21.52 3161.17,20.38 3150.3,20.03 3149.61,20.1 3149.6,20.1 0,20.1 -0.7,20.03 -11.57,20.38 -23.08,21.52 -34.5,23.4 -45.77,26.03 -56.85,29.39 -67.68,33.47 -78.22,38.24 -88.42,43.7 -98.25,49.81 -107.66,56.55 -116.6,63.89 -125.05,71.8 -132.96,80.25 -140.3,89.19 -147.04,98.6 -153.15,108.43 -158.61,118.63 -163.38,129.17 -167.46,140.01 -170.82,151.08 -173.45,162.35 -175.33,173.77 -176.47,185.28 -176.82,196.15 -176.75,196.85 -176.75,1968.5 -176.82,1969.2 -176.47,1980.07 -175.33,1991.59 -173.45,2003 -170.82,2014.27 -167.46,2025.35 -163.38,2036.18 -158.61,2046.72 -153.15,2056.93 -147.04,2066.75 -140.3,2076.16 -132.96,2085.11 -125.05,2093.55 -116.6,2101.46 -107.66,2108.8 -98.25,2115.55 -88.42,2121.66 -78.22,2127.11 -67.68,2131.89 -56.85,2135.96 -45.77,2139.32 -34.5,2141.95 -23.08,2143.84 -11.57,2144.97 -0.7,2145.33 0,2145.26 3149.61,2145.26 3150.3,2145.33
VIN on PWR03 (split plane): 718.8,1253.49 718.8,316.81 690.99,289 641.71,289 616.7,314.01 616.7,427.49 679.3,490.1 680.41,491.75 680.8,493.7 680.8,1123.3 680.41,1125.25 679.3,1126.9 648.5,1157.7 646.85,1158.81 644.9,1159.2 528.11,1159.2 500.4,1186.91 500.4,1272.69 526.41,1298.7 673.59,1298.7
+5V on PWR03 (split plane): 3161.17,2144.97 3172.69,2143.84 3184.11,2141.95 3195.38,2139.32 3206.45,2135.96 3217.28,2131.89 3227.82,2127.11 3238.03,2121.66 3247.86,2115.55 3257.26,2108.8 3266.21,2101.46 3274.65,2093.55 3282.57,2085.11 3289.91,2076.16 3296.65,2066.75 3302.76,2056.93 3308.21,2046.72 3312.99,2036.18 3317.07,2025.35 3320.43,2014.28 3323.05,2003 3324.94,1991.59 3326.07,1980.07 3326.43,1969.2 3326.36,1968.5 3326.36,196.85 3326.43,196.15 3326.07,185.28 3324.94,173.77 3323.05,162.35 3320.43,151.08 3317.07,140.01 3312.99,129.18 3308.21,118.63 3302.76,108.43 3296.65,98.6 3289.91,89.19 3282.57,80.25 3274.65,71.8 3266.21,63.89 3257.26,56.55 3247.86,49.81 3238.03,43.7 3227.82,38.24 3217.28,33.47 3206.45,29.39 3195.38,26.03 3184.11,23.4 3172.69,21.52 3161.17,20.38 3150.3,20.03 3149.61,20.1 3149.6,20.1 0,20.1 -0.7,20.03 -11.57,20.38 -23.08,21.52 -34.5,23.4 -45.77,26.03 -56.85,29.39 -67.68,33.47 -78.22,38.24 -88.42,43.7 -98.25,49.81 -107.66,56.55 -116.6,63.89 -125.05,71.8 -132.96,80.25 -140.3,89.19 -147.04,98.6 -153.15,108.43 -158.61,118.63 -163.38,129.17 -167.46,140.01 -170.82,151.08 -173.45,162.35 -175.33,173.77 -176.47,185.28 -176.82,196.15 -176.75,196.85 -176.75,1968.5 -176.82,1969.2 -176.47,1980.07 -175.33,1991.59 -173.45,2003 -170.82,2014.27 -167.46,2025.35 -163.38,2036.18 -158.61,2046.72 -153.15,2056.93 -147.04,2066.75 -140.3,2076.16 -132.96,2085.11 -125.05,2093.55 -116.6,2101.46 -107.66,2108.8 -98.25,2115.55 -88.42,2121.66 -78.22,2127.11 -67.68,2131.89 -56.85,2135.96 -45.77,2139.32 -34.5,2141.95 -23.08,2143.84 -11.57,2144.97 -0.7,2145.33 0,2145.26 3149.61,2145.26 3150.3,2145.33

## Keep-outs
Keep-Out Layer:
  the board outline again, w10

## Other copper
PWR03 (plane layer: these items are gaps in the copper):
  lines w10: 495.3,1184.8 526,1154.1 644.9,1154.1 675.7,1123.3 675.7,493.7 611.6,429.6 611.6,311.9 639.6,283.9 693.1,283.9 723.9,314.7 723.9,1255.6 675.7,1303.8 524.3,1303.8 495.3,1274.8 495.3,1184.8

## Silkscreen, mask and mechanical layers (free items; w line width, h text height)
Top Overlay:
  lines w10: -6.3,226.26 ccw(c-44.85,152.37) 38.49,152.7 ; 38.49,155.14 238.96,155.14
  text "5V" at 1862.1,2088.9 h45
  text "3V3" at 2038.68,2089.8 h45
  text "5V" at 2161.1,2088.9 h45
  text "VIN" at 2448.92,2087.9 h45
  text "DTR" at 1937.28,2087 h45
  text "GND" at 2268.45,2064.5 h45
  text "Pwr" at 1713.7,1905.3 h85 r90
  text "AI" at 2585.8,1898.5 h90 r270
  text "A1" at 2425.27,1700.7 h80 r90
  text "A6" at 1923.13,1699.51 h80 r90
  text "A5" at 2023.56,1699.4 h80 r90
  text "A4" at 2123.99,1699.01 h80 r90
  text "A3" at 2224.41,1699.79 h80 r90
  text "A2" at 2324.84,1699.65 h80 r90
  text "A0" at 2525.7,1699.01 h80 r90
  text "A7" at 1822.7,1697.79 h80 r90
  text "Ver 2.1" at 2315.1,1481.9 h140
  text "Designer By" at 1723.1,1478.7 h115
  text "Scooo" at 2080.1,1251.4 h135
  text "ATmega2560-16AU" at 1938.7,1091.9 h80
  text "USB" at 10.1,1024.9 h130 r90
  text "DC" at 23.3,866.2 h150
  text "Maker" at 2411.9,865.3 h100
  text "!  Max 18V !" at -125.14,752.8 h100
  text "7-12V" at 2412,734.2 h100
  text "2021" at 2412,603.4 h100
  text "RST" at 1778.3,589.7 h110
  text "M3 × 4" at 56.6,170.77 h60
  text "ICSP" at 1405.8,136.9 h100 r90
Bottom Overlay:
  lines w10: -6.23,226.39 ccw(c-44.85,152.37) 38.61,154.75 ; 40.5,154.8 238.13,154.73 ; 873.2,1225.3 877.6,684 ; 877,1510.8 877.5,1349.2 ; 1531.5,675 1535.9,1216.3
  text "A8" at 3061.6,2026.9 h75
  text "5V" at 2696.4,1925.46 h80
  text "0(RXD0)" at 175.89,1870.45 h65
  text "21(SCL)" at 724.77,1864.58 h63
  text "22" at 2637.55,1825.96 h75
  text "23" at 2750.9,1826.38 h75
  text "A9" at 3228.08,1825.7 h75
  text "1(TXD0)" at 175.89,1770.19 h65
  text "20(SDA)" at 727.5,1765.67 h63
  text "A10" at 3246.65,1729.5 h75
  text "25" at 2750.9,1726.25 h75
  text "24" at 2637.55,1725.83 h75
  text "19(RXD1)" at 739.87,1666.75 h63
  text "2" at 175.89,1657.68 h65
  text "A11" at 3242.83,1631.3 h75
  text "26" at 2637.55,1625.65 h75
  text "27" at 2750.9,1625.23 h75
  text "Ver 2.1" at 1168.2,1596 h110
  text "Designer By" at 1680.4,1582.2 h100
  text "18(TXD1)" at 737.14,1567.84 h63
  text "3" at 175.89,1558.2 h65
  text "28" at 2637.55,1526.01 h75
  text "29" at 2750.9,1526.01 h75
  text "A12" at 3246.61,1526.5 h75
  text "17(RXD2)" at 739.87,1468.93 h63
  text "Use with expansion board" at 1653.7,1467.6 h75 r90
  text "4" at 175.89,1457.16 h65
  text "30" at 2637.55,1425.88 h75
  text "31" at 2750.9,1425.88 h75
  text "A13" at 3246.86,1426.3 h75
  text "Scooo" at 1433.5,1371.7 h120
  text "16(TXD2)" at 737.14,1370.01 h63
  text "5" at 175.89,1357.69 h65
  text "A14" at 3247.55,1329.3 h75
  text "32" at 2637.55,1325.76 h75
  text "33" at 2750.9,1325.76 h75
  text "15(RXD3)" at 739.87,1271.1 h63
  text "6" at 175.89,1257.43 h65
  text "USB" at 13.8,1255.7 h130 r90
  text "ATmega2560-16AU" at 1499.38,1240.7 h70
  text "A15" at 3247.31,1226.3 h75
  text "34" at 2637.55,1225.64 h75
  text "35" at 2750.9,1225.64 h75
  text "14(TXD3)" at 737.14,1172.18 h63
  text "7" at 175.89,1156.39 h65
  text "36" at 2637.55,1125.51 h75
  text "37" at 2750.9,1125.51 h75
  text "SCL" at 3251.68,1123.1 h75
  text "38" at 2637.55,1025.39 h75
  text "39" at 2750.9,1025.39 h75
  text "SDA" at 3256.26,1024.3 h75
  text "Maker" at 693.9,952.8 h92
  text "40" at 2637.35,930.49 h75
  text "41" at 2750.7,930.06 h75
  text "AREF" at 3276.52,926.2 h75
  text "42" at 2637.35,830.42 h75
  text "43" at 2750.7,830.84 h75
  text "GND" at 3258.03,821.1 h75
  text "7-12V" at 694,792.2 h95
  text "44" at 2637.35,730.3 h75
  text "45" at 2750.7,730.72 h75
  text "DC" at 293.3,727.5 h140
  text "13" at 3220,725.3 h75
  text "This 8-bit board with 54 digital I / O pins (15 of which can be used as PWM outputs), 16 analog inputs and 4 UARTS (hardware serial ports)" at 1473,669.7 h70
  text "2021" at 694.9,631.3 h103
  text "46" at 2637.35,630.08 h75
  text "47" at 2750.7,629.69 h75
  text "12" at 3219.76,625.4 h75
  text "11" at 3215.97,528 h75
  text "48" at 2637.55,524.77 h75
  text "49" at 2750.9,524.77 h75
  text "ICSP" at 1480.2,453.8 h120
  text "10" at 3219.79,430.2 h75
  text "50" at 2637.55,424.65 h75
  text "51" at 2750.9,424.65 h75
  text "9" at 3202.79,331.7 h75
  text "52" at 2637.55,324.53 h75
  text "53" at 2750.9,324.53 h75
  text "GND" at 2725.6,220.66 h80
  text "M3 × 4" at 215.76,170.57 h60
  text "8" at 3033.6,121.86 h63

## Text inside footprints (layer, text, board x,y; h text height)
U3: Mechanical 16 "TQFP 100" at 2182.35,862.74 h49.6; Mechanical 16 "R" at 1937.72,918.25 h37.2